# Altium PCB PCB3.PcbDoc
Units mil, origin at the board's own origin, x right, y up, seen from the top; angles counter-clockwise.
Board outline 3170 x 1845 mil, 2 copper layers (Top Layer, Bottom Layer); 11 components, 7 nets, 23 pads, 0 vias.
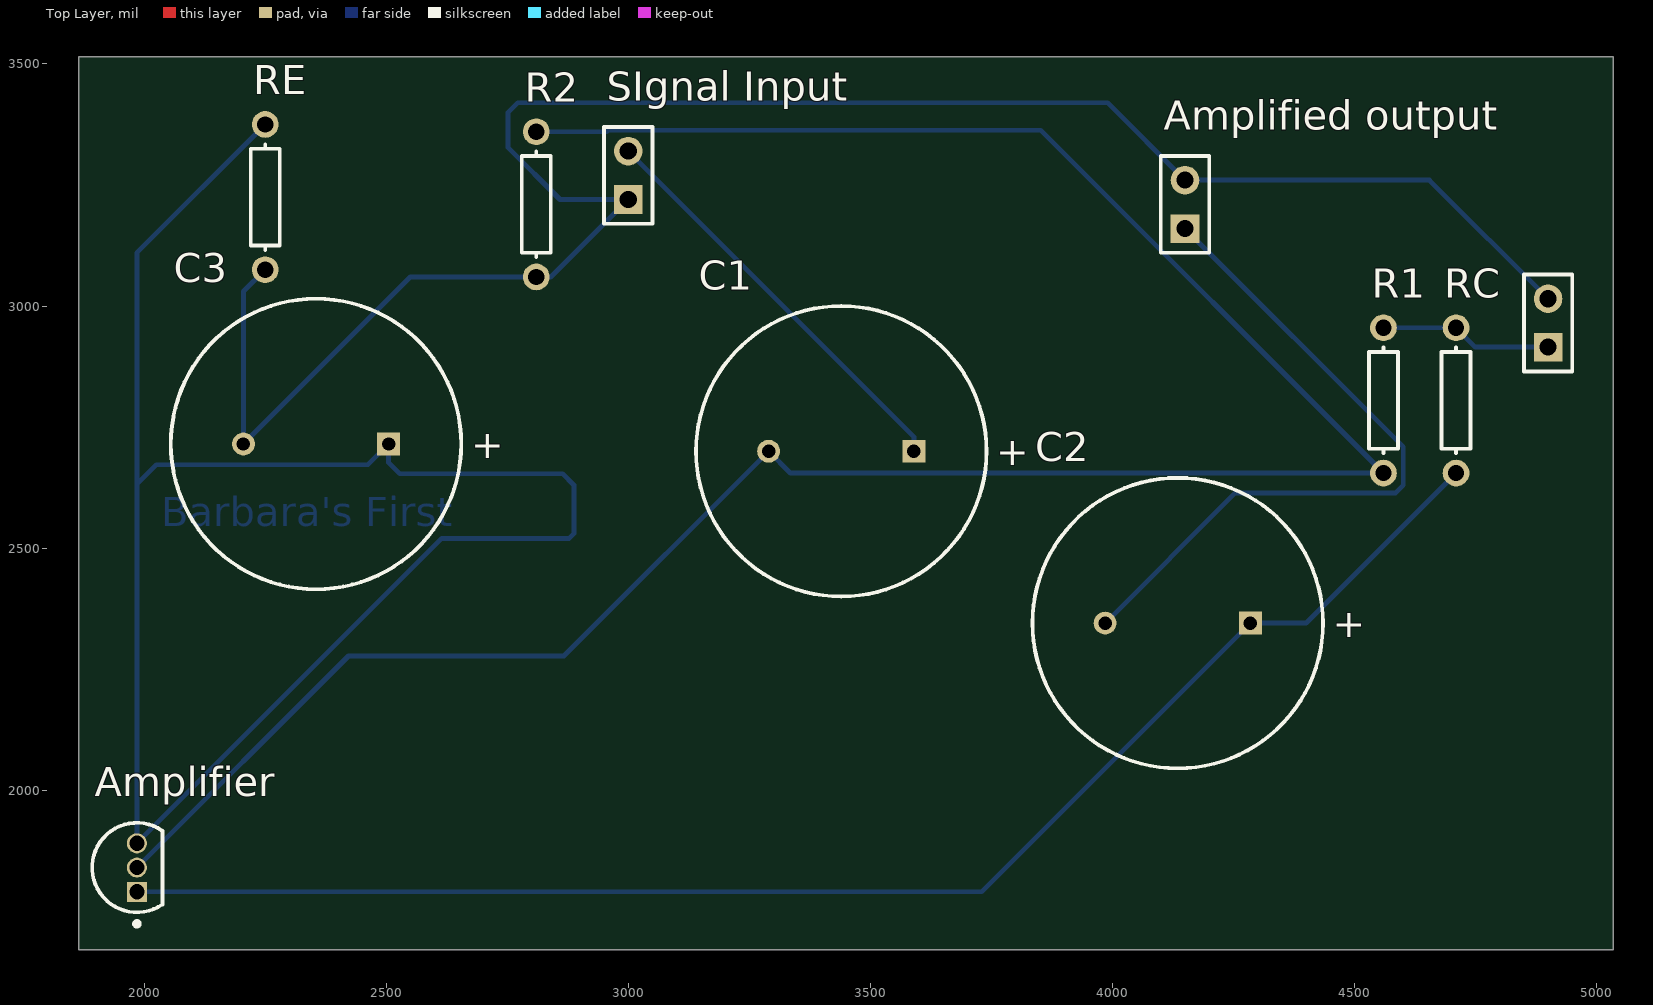
[diagram p0: Top Layer view]
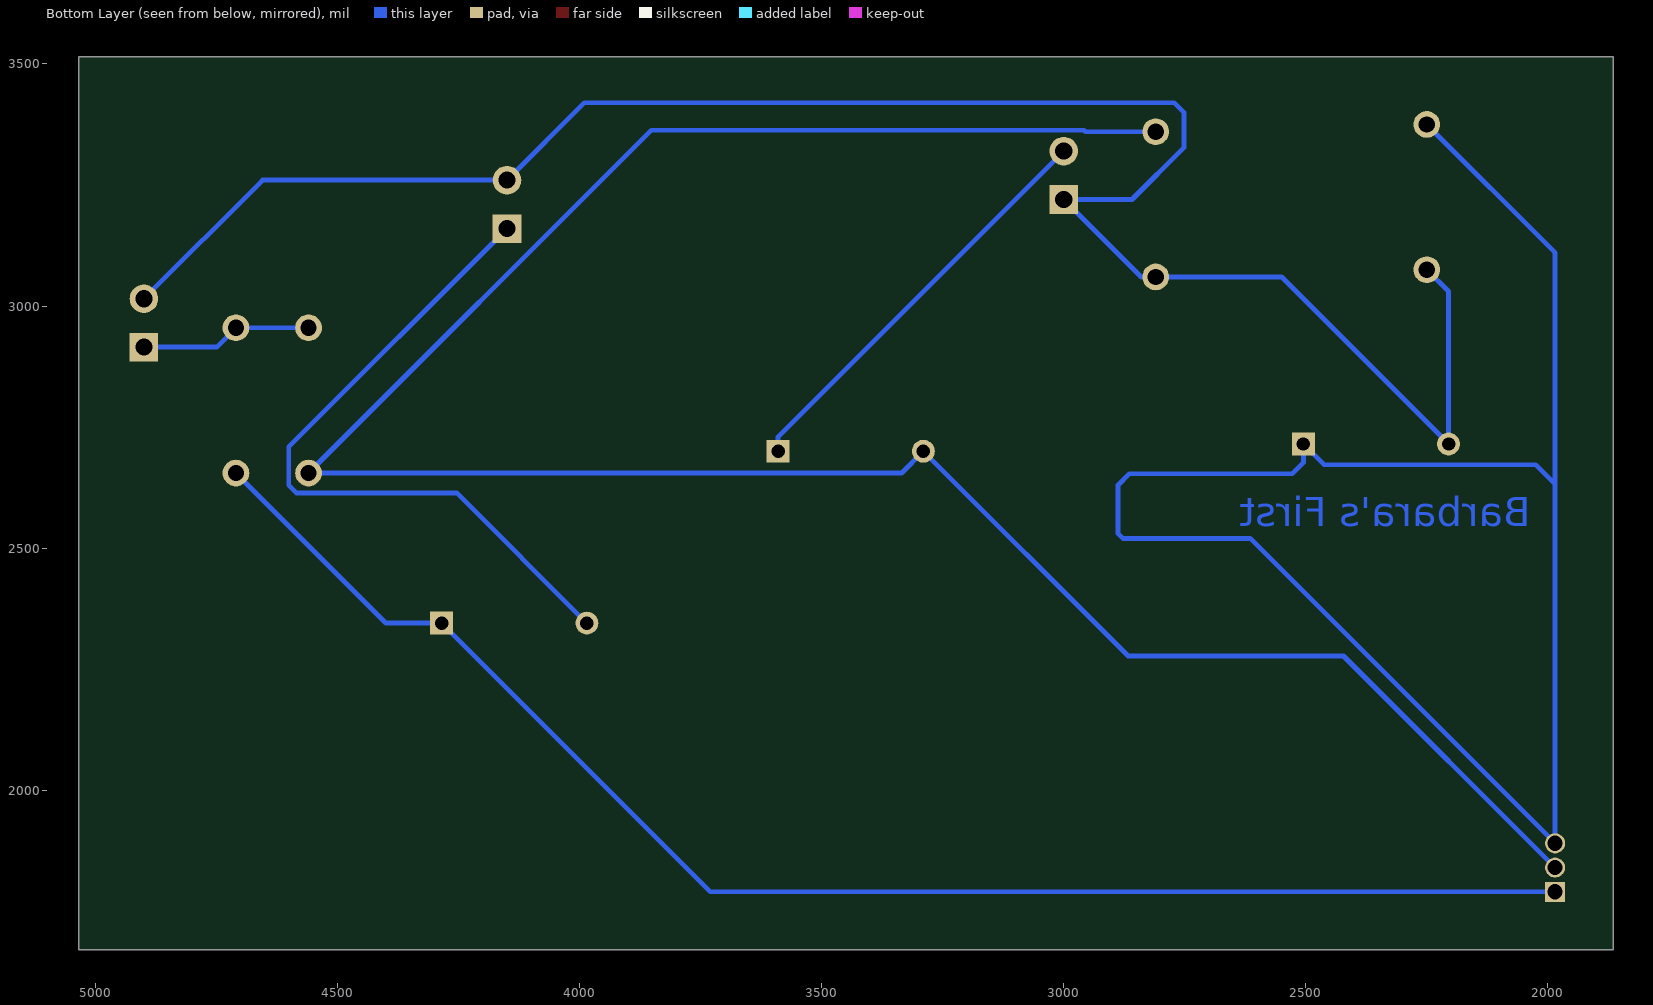
[diagram p1: Bottom Layer view, seen from below]

## Layer stack, top to bottom
Top Solder: solder mask 0.4, Solder Resist, Dk 3.5
Top Layer: signal copper 1.4
Dielectric 1: dielectric 12.6, FR-4, Dk 4.8
Bottom Layer: signal copper 1.4
Bottom Solder: solder mask 0.4, Solder Resist, Dk 3.5

## Board outline
1865,1670 5035,1670 5035,3515 1865,3515

## Design rules (kind name [scope] priority, off if disabled: settings)
Clearance [All] p1: gap=7.87 ignorepadtopadclearanceinfootprint=FALSE
PolygonConnect [All] p1: connectstyle=Relief reliefconductorwidth=10 reliefentries=4 polygonreliefangle="90 Angle" airgapwidth=10
RoomDefinition Sheet1 [InComponentClass('Sheet1')] p1: confinementstyle=ConfineIn formatcopy=TRUE lockcomponents=FALSE outline 1860.25,1670 5015.25,1670 5015.25,3515 1860.25,3515
RoutingLayers [All] p1: top layer_v5=FALSE bottom layer_v5=TRUE
RoutingVias [All] p1: holewidth=28 width=50 viastyle="Through Hole" minholewidth=28 minwidth=50 maxholewidth=28 maxwidth=50
SolderMaskExpansion [All] p1: expansion=4 istentingtop=FALSE
Width [All] p1: maxlimit=10 minlimit=10 preferedwidth=10
29 further rules are at their usual default settings.

## Classes and differential pairs
component class Sheet1: "Amplified output" Amplifier C1 C2 C3 R1 R2 RC RE "SIgnal Input"

## Components (designator, comment, footprint, x,y, rotation, side; value= is the part's Value field where it differs from the comment)
"Amplified output" "Header 2" HDR1X2 4150.25,3160 r90 top
Amplifier "BC547B" ONSC-TO-92-3-29-11 1985.25,1840 r90 top
C1 "Cap Pol1" RB7.6-15 3440.25,2700 r0 top value=10mu
C2 "Cap Pol1" RB7.6-15 4135.25,2345 r0 top value=10mu
C3 "Cap Pol1" RB7.6-15 2355.25,2715 r0 top value=100mu
R1 "" AXIAL-0.3 4560.25,2805 r90 top value=10K
R2 "" AXIAL-0.3 2810.25,3210 r90 top value=2.2K
RC "" AXIAL-0.3 4710.25,2805 r90 top value=4.7K
RE "" AXIAL-0.3 2250.25,3225 r90 top value=1K
"SIgnal Input" "Header 2" HDR1X2 3000.25,3220 r90 top
? "Header 2" HDR1X2 4900.25,2915 r90 top

## Footprints (in the part's own frame and the unit in brackets; to place one, negate y for a bottom-side part, rotate by r counter-clockwise, add the part's x,y. Pads: shape width x height; smd on the part's side, far side on the other; paste and mask are expansions set on the pad)
AXIAL-0.3 [mm] "Axial Device, Thru-Hole; 2 Leads; 0.3 in Pin Spacing"
  round 1.4 hole 0.85: 1(-3.81,0) 2(3.81,0)
  silkscreen extent -2.77,-0.76 2.77,0.76
HDR1X2 [mm] "Connector; Header; 2 Position"
  rect 1.5x1.5 hole 0.9: 1(0,0)
  round 1.5 hole 0.9: 2(2.54,0)
  silkscreen extent -1.27,-1.27 3.81,1.27
ONSC-TO-92-3-29-11 [mm] "TO, 3-Leads, Body Dia 4.7mm, Pitch 1.27mm"
  rect 1.05x1.05 hole 0.8: 1(-1.27,0)
  round 1.05 hole 0.8: 2(0,0) 3(1.27,0)
  silkscreen extent -3.07,-1.34 2.35,2.35, body extent -2.35,-1.33 2.36,2.36, height 7.87
RB7.6-15 [mm] "Polarized Capacitor (Radial); 2 Leads"
  rect 1.2x1.2 hole 0.7: 1(3.81,0)
  round 1.2 hole 0.7: 2(-3.81,0)
  silkscreen extent -7.62,-7.62 7.62,7.62

## Part data
"Amplified output" "SIgnal Input" ?: "Header, 2-Pin", LatestRevisionDate=17-Jul-2002, LatestRevisionNote="Re-released for DXP Platform.", Publisher="Altium Limited"
Amplifier: library part CMP-1048-01467-1, "Amplifier Transistor, NPN Silicon, 3-Pin TO-92, Bulk Box", Manufacturer="On Semiconductor", ComponentLink1Description="Manufacturer URL", ComponentLink1URL=http://www.onsemi.com/, ComponentLink2Description=Datasheet, ComponentLink2URL=http://www.onsemi.com/pub_link/Collateral/BC546-D.PDF, ComponentLink3Description="Package Specification", ComponentLink3URL=http://www.onsemi.cn/pub_link/Collateral/2N6426-D.PDF, DatasheetVersion="Rev. 7", fT Min (MHz)=150, IC Continuous (A)=0.1, Mounting Technology="Through Hole", PackageDescription="3-Pin Transistor Outline, Body 4.825 x 3.685 mm, Pitch 1.27 mm", PackageReference=TO-92-3-29-11_AM_SL, PackageVersion="Rev. AM", Packing="Bulk Box", PartNumber=BC547B, Polarity=NPN, RoHS=FALSE
C1 C2 C3: "Polarized Capacitor (Radial)", LatestRevisionDate=17-Jul-2002, LatestRevisionNote="Re-released for DXP Platform.", PackageDescription="Polarized Capacitor (Radial); 2 Leads", PackageReference=RB7.6-15, Published=8-Jun-2000, Publisher="Altium Limited"
R1 R2 RC RE: library part Res1, "Resistor", LatestRevisionDate=17-Jul-2002, LatestRevisionNote="Re-released for DXP Platform.", PackageDescription="Axial Device, Thru-Hole; 2 Leads; 0.3 in Pin Spacing", PackageReference=AXIAL-0.3, Published=8-Jun-2000, Publisher="Altium Limited"

## Nets (pads, with @x,y where several pads share a name; then routed paths per layer and width w, separated by ;. In a path a pad name is that pad's centre, name@x,y a point inside that pad or via, vN(x,y) a via of type N, cw(c..) or ccw(c..) an arc to the next point about the centre after c; other vN are vias at no path point)
GND: "Amplified output.2" "SIgnal Input.1" ?.2 C3.2 R2.1 RE.1 | length 4072.6
  Bottom Layer w10: RE.1 2205.25,3030 C3.2 2550.25,3060 R2.1 2840.25,3060 3000.25,3220 2859.25,3220 2751.94,3327.31 2751.94,3400 2771.94,3420 3990.25,3420 4150.25,3260 4655.25,3260 ?.2
"NetAmplified output_1": "Amplified output.1" C2.2 | length 1450.9
  Bottom Layer w10: C2.2 4254.25,2614 4585.25,2614 4601.25,2630 4601.25,2709 4150.25,3160
NetAmplifier_1: Amplifier.1 C2.1 RC.1 | length 3083.3
  Bottom Layer w10: Amplifier.1 3730.25,1790 C2.1 4400.25,2345 RC.1
NetAmplifier_2: Amplifier.2 C1.2 R1.1 R2.2 | length 4994.4
  Bottom Layer w10: Amplifier.2 2422.25,2277 2867.25,2277 C1.2 3335.25,2655 R1.1 3852.25,3363 2958.25,3363 2955.25,3360 R2.2
NetAmplifier_3: Amplifier.3 C3.1 RE.2 | length 3857.7
  Bottom Layer w10: RE.2 1985.25,3110 1985.25,2632 ; 1985.25,2632 Amplifier.3 2615.25,2520 2878.19,2520 2887.86,2529.67 2887.86,2630.31 2864.82,2653.34 2528.29,2653.34 2505.25,2676.38 C3.1 2462.25,2672 2025.25,2672 1985.25,2632
NetC1_1: "SIgnal Input.2" C1.1 | length 864.4
  Bottom Layer w10: 3000.25,3320 3590.25,2730 C1.1
VCC: ?.1 R1.2 RC.2 | length 356.6
  Bottom Layer w10: R1.2 RC.2 4750.25,2915 ?.1

## Other copper
Bottom Layer:
  text "Barbara's First" at 2035.25,2545 h60

## Text inside footprints (layer, text, board x,y; h text height)
C1: Top Overlay "+" at 3760.41,2670.99 h59.06
C2: Top Overlay "+" at 4455.41,2315.99 h59.06
C3: Top Overlay "+" at 2675.41,2685.99 h59.06